# Altium PCB PCB2.PcbDoc
Units mm, origin at the board's own origin, x right, y up, seen from the top; angles counter-clockwise.
Board outline 152.4 x 101.6 mm, 4 copper layers (Top Layer, Mid-Layer 1, Mid-Layer 2, Bottom Layer); 6 components, 0 nets, 959 pads, 0 vias.
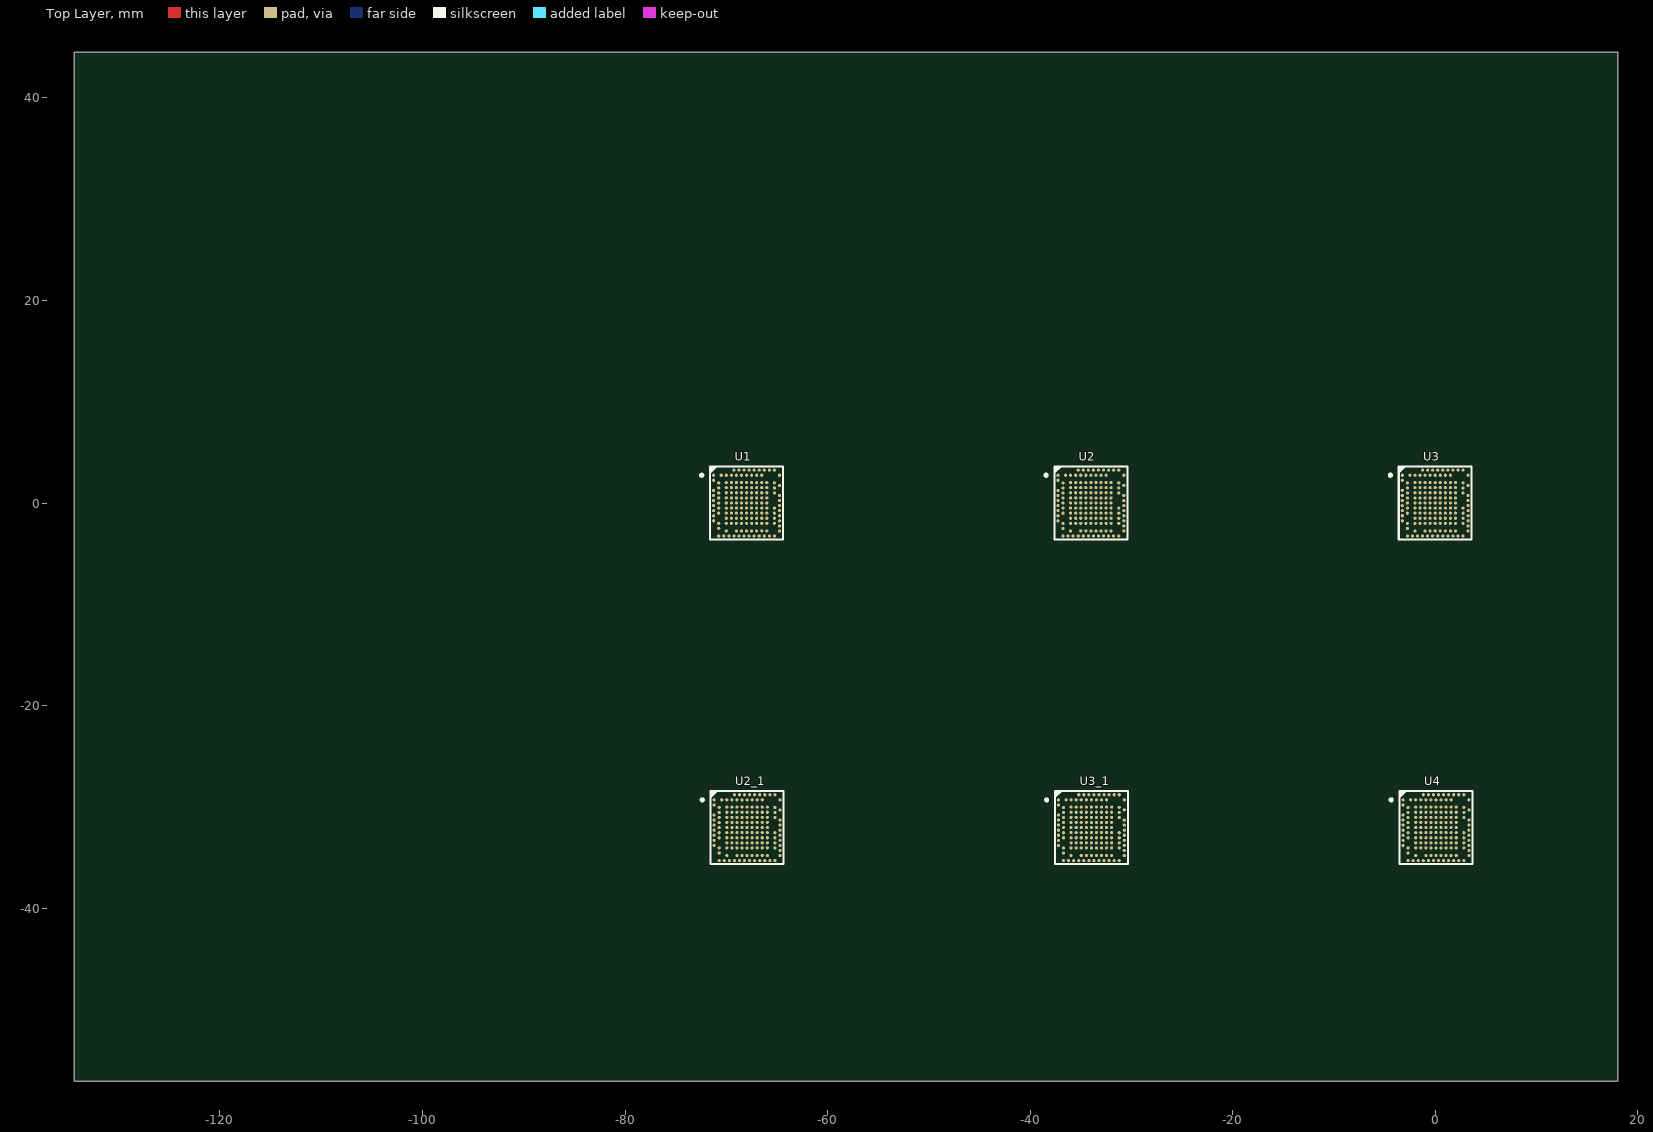
[diagram p0: Top Layer view]
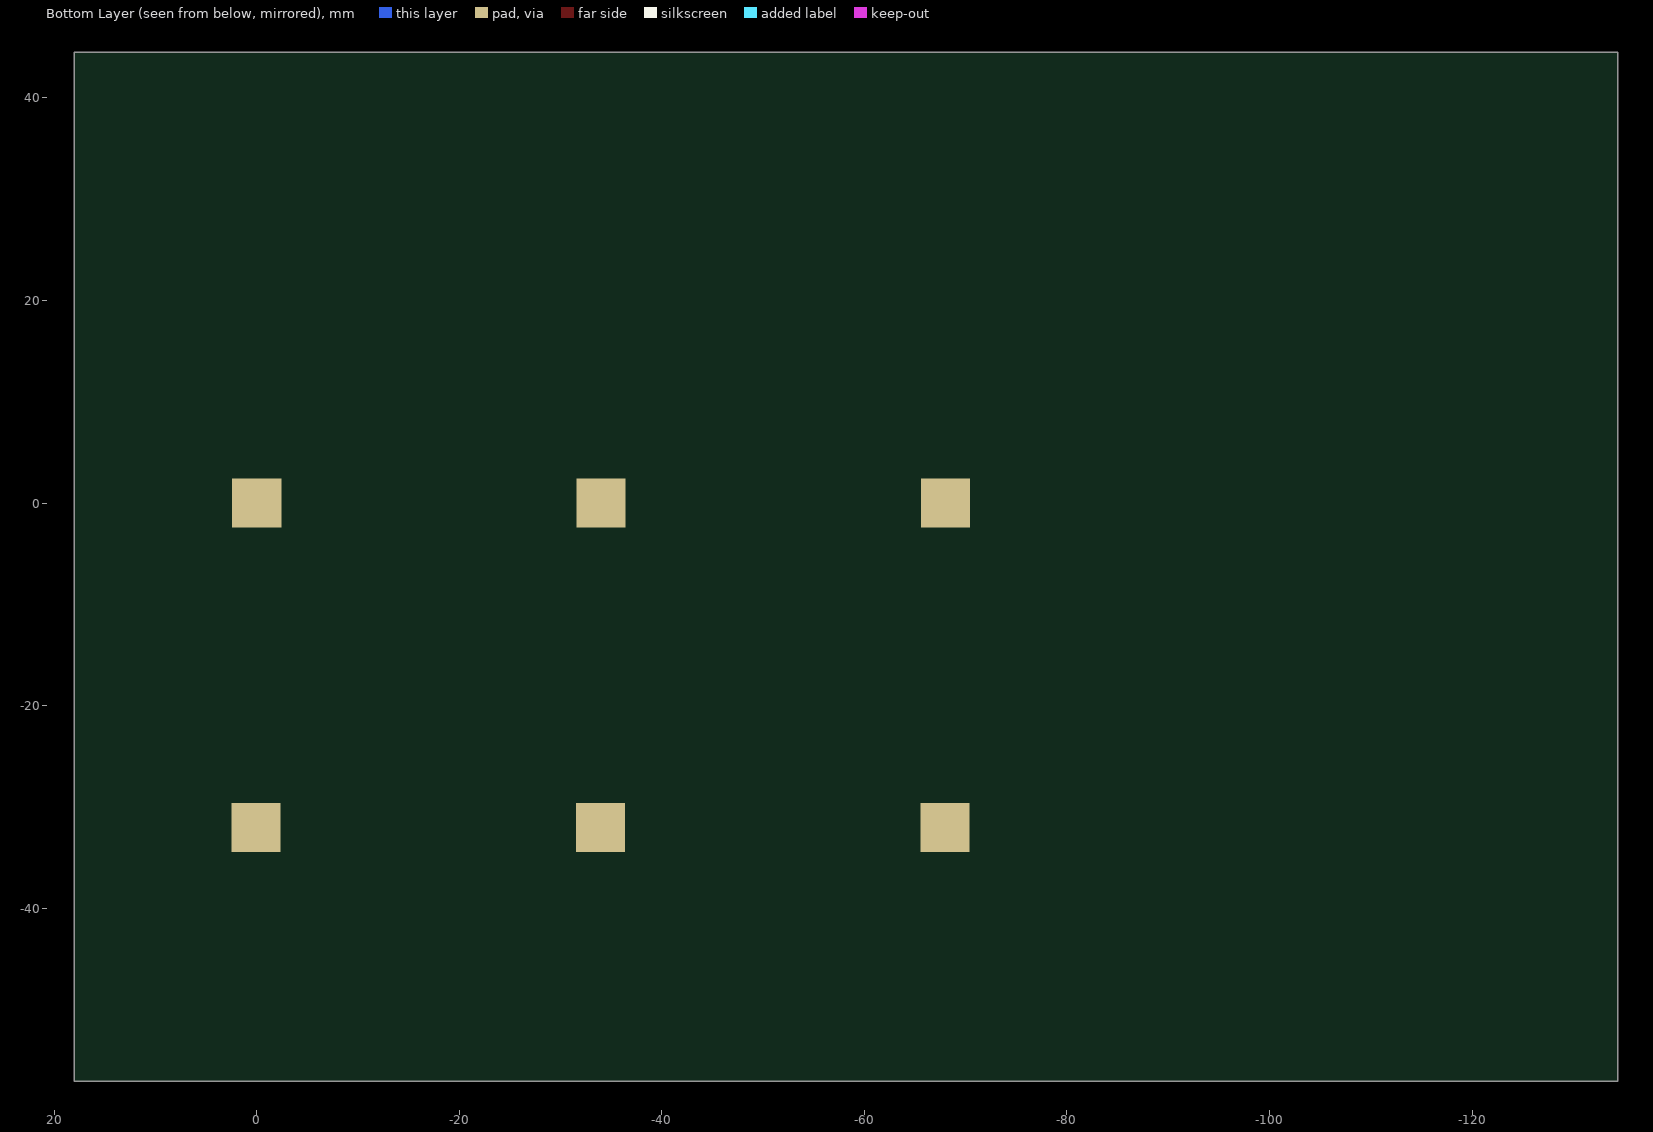
[diagram p1: Bottom Layer view, seen from below]

## Layer stack, top to bottom
Top Solder: solder mask 0.0102, Solder Resist, Dk 3.5
Top Layer: signal copper 0.0356
Dielectric 1: dielectric 0.32, FR-4, Dk 4.8
Mid-Layer 1: signal copper 0.0356
Dielectric3: dielectric 0.32, FR-4, Dk 4.8
Mid-Layer 2: signal copper 0.0356
Dielectric2: dielectric 0.32, FR-4, Dk 4.8
Bottom Layer: signal copper 0.0356
Bottom Solder: solder mask 0.0102, Solder Resist, Dk 3.5

## Board outline
-134.38,-57.088 18.02,-57.088 18.02,44.512 -134.38,44.512

## Design rules (kind name [scope] priority, off if disabled: settings)
Clearance [All] p1: gap=0.254 ignorepadtopadclearanceinfootprint=FALSE except(0: Arc-Hole Track-Hole SMDPad-Hole THPad-Hole Via-Hole Fill-Hole Poly-Hole Region-Hole Text-Hole)
PolygonConnect [All] p1: connectstyle=Relief reliefconductorwidth=0.254 reliefentries=4 polygonreliefangle="90 Angle" airgapwidth=0.254
RoutingVias [All] p1: holewidth=0.711 width=1.27 viastyle="Through Hole" minholewidth=0.711 minwidth=1.27 maxholewidth=0.711 maxwidth=1.27
SolderMaskExpansion [All] p1: expansion=0.102
Width [All] p1: maxlimit=0.254 minlimit=0.254 preferedwidth=0.254
30 further rules are at their usual default settings.

## Components (designator, comment, footprint, x,y, rotation, side; value= is the part's Value field where it differs from the comment)
U1 "nRF52840-QIAA" AQFN50P700X700X85_HS-74N -68,0 r0 top
U2 "nRF52840-QIAA" AQFN50P700X700X85_HS-74N -34,0 r0 top (schematic designator U1)
U2_1 "nRF52840-QIAA" AQFN50P700X700X85_HS-74N -67.95,-32.05 r0 top (schematic designator U1)
U3 "nRF52840-QIAA" AQFN50P700X700X85_HS-74N 0,0 r0 top (schematic designator U1)
U3_1 "nRF52840-QIAA" AQFN50P700X700X85_HS-74N -33.95,-32.05 r0 top (schematic designator U1)
U4 "nRF52840-QIAA" AQFN50P700X700X85_HS-74N 0.075,-32.05 r0 top (schematic designator U1)

## Footprints (in the part's own frame and the unit in brackets; to place one, negate y for a bottom-side part, rotate by r counter-clockwise, add the part's x,y. Pads: shape width x height; smd on the part's side, far side on the other; paste and mask are expansions set on the pad)
AQFN50P700X700X85_HS-74N [mm]
  rect 4.85x4.85 smd far side mask+0.03: 74(0,0)
  round 0.31 smd paste+0.012 mask+0.05: A8(-1.25,3.25) A10(-0.75,3.25) A12(-0.25,3.25) A14(0.25,3.25) A16(0.75,3.25) A18(1.25,3.25) A20(1.75,3.25) A22(2.25,3.25) A23(2.75,3.25) AA24(3.25,-2.25) AB2(-2.75,-2.5) AC5(-2,-2.75) AC9(-1,-2.75) AC11(-0.5,-2.75) AC13(0,-2.75) AC15(0.5,-2.75) AC17(1,-2.75) AC19(1.5,-2.75) AC21(2,-2.75) AC24(3.25,-2.75) AD2(-2.75,-3.25) AD4(-2.25,-3.25) AD6(-1.75,-3.25) AD8(-1.25,-3.25) AD10(-0.75,-3.25) AD12(-0.25,-3.25) AD14(0.25,-3.25) AD16(0.75,-3.25) AD18(1.25,-3.25) AD20(1.75,-3.25) AD22(2.25,-3.25) AD23(2.75,-3.25) B1(-3.25,2.75) B3(-2.5,2.75) B5(-2,2.75) B7(-1.5,2.75) B9(-1,2.75) B11(-0.5,2.75) B13(0,2.75) B15(0.5,2.75) B17(1,2.75) B19(1.5,2.75) B24(3.25,2.75) C1(-3.25,2.25) D2(-2.75,2) D23(2.75,2) E24(3.25,1.75) F2(-2.75,1.5) F23(2.75,1.5) G1(-3.25,1.25) H2(-2.75,1) H23(2.75,1) J1(-3.25,0.75) J24(3.25,0.75) K2(-2.75,0.5) L1(-3.25,0.25) L24(3.25,0.25) M2(-2.75,0) N1(-3.25,-0.25) N24(3.25,-0.25) P2(-2.75,-0.5) P23(2.75,-0.5) R1(-3.25,-0.75) R24(3.25,-0.75) T2(-2.75,-1) T23(2.75,-1) U1(-3.25,-1.25) U24(3.25,-1.25) V23(2.75,-1.5) W1(-3.25,-1.75) W24(3.25,-1.75) Y2(-2.75,-2) Y23(2.75,-2)
  silkscreen extent -4.55,-3.6 3.6,3.6, body extent -3.55,-3.55 3.55,3.55, height 0.85

## Part data
U1 U2 U2_1 U3 U3_1 U4: "Multi-protocol Bluetooth Low Energy, IEEE 802.15.4, ANT and 2.4GHz proprietary system-on-chip", Manufacturer="Nordic Semiconductor", Manufacturer Part Number=nRF52840-QIAAC0, Part number IPS=N.A., Artikkelnr Noca=N.A., Artikkelnr Simpro=N.A., ComponentLink1Description=Datasheet, ComponentLink2Description="Supplier link", Footprint Doc=AQFN-73, LatestRevisionDate=2017-12-06, Part Number=nRF52840-QIAAC0, Pin Count=73, Published=2017-08-21, Publisher="Nordic Semiconductor", Supplier="Nordic Semiconductor", Supplier part number=nRF52840-QIAAC0

## Free pads (board coordinates)
  round 0.31 smd paste+0.012 mask+0.05: 0(-70,-2) 0(-70,-1.497) 0(-70,-0.994) 0(-70,-0.491) 0(-70,0.012) 0(-70,0.516) 0(-70,1.019) 0(-70,1.522) 0(-70,2.025) 0(-69.95,-34.05) 0(-69.95,-33.547) 0(-69.95,-33.044) 0(-69.95,-32.541) 0(-69.95,-32.038) 0(-69.95,-31.534) 0(-69.95,-31.031) 0(-69.95,-30.528) 0(-69.95,-30.025) 0(-69.5,-2) 0(-69.5,-1.497) 0(-69.5,-0.994) 0(-69.5,-0.491) 0(-69.5,0.012) 0(-69.5,0.516) 0(-69.5,1.019) 0(-69.5,1.522) 0(-69.5,2.025) 0(-69.45,-34.05) 0(-69.45,-33.547) 0(-69.45,-33.044) 0(-69.45,-32.541) 0(-69.45,-32.038) 0(-69.45,-31.534) 0(-69.45,-31.031) 0(-69.45,-30.528) 0(-69.45,-30.025) 0(-69,-2) 0(-69,-1.497) 0(-69,-0.994) 0(-69,-0.491) 0(-69,0.012) 0(-69,0.516) 0(-69,1.019) 0(-69,1.522) 0(-69,2.025) 0(-68.95,-34.05) 0(-68.95,-33.547) 0(-68.95,-33.044) 0(-68.95,-32.541) 0(-68.95,-32.038) 0(-68.95,-31.534) 0(-68.95,-31.031) 0(-68.95,-30.528) 0(-68.95,-30.025) 0(-68.5,-2) 0(-68.5,-1.497) 0(-68.5,-0.994) 0(-68.5,-0.491) 0(-68.5,0.012) 0(-68.5,0.516) 0(-68.5,1.019) 0(-68.5,1.522) 0(-68.5,2.025) 0(-68.45,-34.05) 0(-68.45,-33.547) 0(-68.45,-33.044) 0(-68.45,-32.541) 0(-68.45,-32.038) 0(-68.45,-31.534) 0(-68.45,-31.031) 0(-68.45,-30.528) 0(-68.45,-30.025) 0(-68,-2) 0(-68,-1.497) 0(-68,-0.994) 0(-68,-0.491) 0(-68,0.012) 0(-68,0.516) 0(-68,1.019) 0(-68,1.522) 0(-68,2.025) 0(-67.95,-34.05) 0(-67.95,-33.547) 0(-67.95,-33.044) 0(-67.95,-32.541) 0(-67.95,-32.038) 0(-67.95,-31.534) 0(-67.95,-31.031) 0(-67.95,-30.528) 0(-67.95,-30.025) 0(-67.5,-2) 0(-67.5,-1.497) 0(-67.5,-0.994) 0(-67.5,-0.491) 0(-67.5,0.012) 0(-67.5,0.516) 0(-67.5,1.019) 0(-67.5,1.522) 0(-67.5,2.025) 0(-67.45,-34.05) 0(-67.45,-33.547) 0(-67.45,-33.044) 0(-67.45,-32.541) 0(-67.45,-32.038) 0(-67.45,-31.534) 0(-67.45,-31.031) 0(-67.45,-30.528) 0(-67.45,-30.025) 0(-67,-2) 0(-67,-1.497) 0(-67,-0.994) 0(-67,-0.491) 0(-67,0.012) 0(-67,0.516) 0(-67,1.019) 0(-67,1.522) 0(-67,2.025) 0(-66.95,-34.05) 0(-66.95,-33.547) 0(-66.95,-33.044) 0(-66.95,-32.541) 0(-66.95,-32.038) 0(-66.95,-31.534) 0(-66.95,-31.031) 0(-66.95,-30.528) 0(-66.95,-30.025) 0(-66.5,-2) 0(-66.5,-1.497) 0(-66.5,-0.994) 0(-66.5,-0.491) 0(-66.5,0.012) 0(-66.5,0.516) 0(-66.5,1.019) 0(-66.5,1.522) 0(-66.5,2.025) 0(-66.45,-34.05) 0(-66.45,-33.547) 0(-66.45,-33.044) 0(-66.45,-32.541) 0(-66.45,-32.038) 0(-66.45,-31.534) 0(-66.45,-31.031) 0(-66.45,-30.528) 0(-66.45,-30.025) 0(-66,-2) 0(-66,-1.497) 0(-66,-0.994) 0(-66,-0.491) 0(-66,0.012) 0(-66,0.516) 0(-66,1.019) 0(-66,1.522) 0(-66,2.025) 0(-65.95,-34.05) 0(-65.95,-33.547) 0(-65.95,-33.044) 0(-65.95,-32.541) 0(-65.95,-32.038) 0(-65.95,-31.534) 0(-65.95,-31.031) 0(-65.95,-30.528) 0(-65.95,-30.025) 0(-36,-2) 0(-36,-1.497) 0(-36,-0.994) 0(-36,-0.491) 0(-36,0.012) 0(-36,0.516) 0(-36,1.019) 0(-36,1.522) 0(-36,2.025) 0(-35.95,-34.05) 0(-35.95,-33.547) 0(-35.95,-33.044) 0(-35.95,-32.541) 0(-35.95,-32.038) 0(-35.95,-31.534) 0(-35.95,-31.031) 0(-35.95,-30.528) 0(-35.95,-30.025) 0(-35.5,-2) 0(-35.5,-1.497) 0(-35.5,-0.994) 0(-35.5,-0.491) 0(-35.5,0.012) 0(-35.5,0.516) 0(-35.5,1.019) 0(-35.5,1.522) 0(-35.5,2.025) 0(-35.45,-34.05) 0(-35.45,-33.547) 0(-35.45,-33.044) 0(-35.45,-32.541) 0(-35.45,-32.038) 0(-35.45,-31.534) 0(-35.45,-31.031) 0(-35.45,-30.528) 0(-35.45,-30.025) 0(-35,-2) 0(-35,-1.497) 0(-35,-0.994) 0(-35,-0.491) 0(-35,0.012) 0(-35,0.516) 0(-35,1.019) 0(-35,1.522) 0(-35,2.025) 0(-34.95,-34.05) 0(-34.95,-33.547) 0(-34.95,-33.044) 0(-34.95,-32.541) 0(-34.95,-32.038) 0(-34.95,-31.534) 0(-34.95,-31.031) 0(-34.95,-30.528) 0(-34.95,-30.025) 0(-34.5,-2) 0(-34.5,-1.497) 0(-34.5,-0.994) 0(-34.5,-0.491) 0(-34.5,0.012) 0(-34.5,0.516) 0(-34.5,1.019) 0(-34.5,1.522) 0(-34.5,2.025) 0(-34.45,-34.05) 0(-34.45,-33.547) 0(-34.45,-33.044) 0(-34.45,-32.541) 0(-34.45,-32.038) 0(-34.45,-31.534) 0(-34.45,-31.031) 0(-34.45,-30.528) 0(-34.45,-30.025) 0(-34,-2) 0(-34,-1.497) 0(-34,-0.994) 0(-34,-0.491) 0(-34,0.012) 0(-34,0.516) 0(-34,1.019) 0(-34,1.522) 0(-34,2.025) 0(-33.95,-34.05) 0(-33.95,-33.547) 0(-33.95,-33.044) 0(-33.95,-32.541) 0(-33.95,-32.038) 0(-33.95,-31.534) 0(-33.95,-31.031) 0(-33.95,-30.528) 0(-33.95,-30.025) 0(-33.5,-2) 0(-33.5,-1.497) 0(-33.5,-0.994) 0(-33.5,-0.491) 0(-33.5,0.012) 0(-33.5,0.516) 0(-33.5,1.019) 0(-33.5,1.522) 0(-33.5,2.025) 0(-33.45,-34.05) 0(-33.45,-33.547) 0(-33.45,-33.044) 0(-33.45,-32.541) 0(-33.45,-32.038) 0(-33.45,-31.534) 0(-33.45,-31.031) 0(-33.45,-30.528) 0(-33.45,-30.025) 0(-33,-2) 0(-33,-1.497) 0(-33,-0.994) 0(-33,-0.491) 0(-33,0.012) 0(-33,0.516) 0(-33,1.019) 0(-33,1.522) 0(-33,2.025) 0(-32.95,-34.05) 0(-32.95,-33.547) 0(-32.95,-33.044) 0(-32.95,-32.541) 0(-32.95,-32.038) 0(-32.95,-31.534) 0(-32.95,-31.031) 0(-32.95,-30.528) 0(-32.95,-30.025) 0(-32.5,-2) 0(-32.5,-1.497) 0(-32.5,-0.994) 0(-32.5,-0.491) 0(-32.5,0.012) 0(-32.5,0.516) 0(-32.5,1.019) 0(-32.5,1.522) 0(-32.5,2.025) 0(-32.45,-34.05) 0(-32.45,-33.547) 0(-32.45,-33.044) 0(-32.45,-32.541) 0(-32.45,-32.038) 0(-32.45,-31.534) 0(-32.45,-31.031) 0(-32.45,-30.528) 0(-32.45,-30.025) 0(-32,-2) 0(-32,-1.497) 0(-32,-0.994) 0(-32,-0.491) 0(-32,0.012) 0(-32,0.516) 0(-32,1.019) 0(-32,1.522) 0(-32,2.025) 0(-31.95,-34.05) 0(-31.95,-33.547) 0(-31.95,-33.044) 0(-31.95,-32.541) 0(-31.95,-32.038) 0(-31.95,-31.534) 0(-31.95,-31.031) 0(-31.95,-30.528) 0(-31.95,-30.025) 0(-2,-2) 0(-2,-1.497) 0(-2,-0.994) 0(-2,-0.491) 0(-2,0.012) 0(-2,0.516) 0(-2,1.019) 0(-2,1.522) 0(-2,2.025) 0(-1.925,-34.05) 0(-1.925,-33.547) 0(-1.925,-33.044) 0(-1.925,-32.541) 0(-1.925,-32.038) 0(-1.925,-31.534) 0(-1.925,-31.031) 0(-1.925,-30.528) 0(-1.925,-30.025) 0(-1.5,-2) 0(-1.5,-1.497) 0(-1.5,-0.994) 0(-1.5,-0.491) 0(-1.5,0.012) 0(-1.5,0.516) 0(-1.5,1.019) 0(-1.5,1.522) 0(-1.5,2.025) 0(-1.425,-34.05) 0(-1.425,-33.547) 0(-1.425,-33.044) 0(-1.425,-32.541) 0(-1.425,-32.038) 0(-1.425,-31.534) 0(-1.425,-31.031) 0(-1.425,-30.528) 0(-1.425,-30.025) 0(-1,-2) 0(-1,-1.497) 0(-1,-0.994) 0(-1,-0.491) 0(-1,0.012) 0(-1,0.516) 0(-1,1.019) 0(-1,1.522) 0(-1,2.025) 0(-0.925,-34.05) 0(-0.925,-33.547) 0(-0.925,-33.044) 0(-0.925,-32.541) 0(-0.925,-32.038) 0(-0.925,-31.534) 0(-0.925,-31.031) 0(-0.925,-30.528) 0(-0.925,-30.025) 0(-0.5,-2) 0(-0.5,-1.497) 0(-0.5,-0.994) 0(-0.5,-0.491) 0(-0.5,0.012) 0(-0.5,0.516) 0(-0.5,1.019) 0(-0.5,1.522) 0(-0.5,2.025) 0(-0.425,-34.05) 0(-0.425,-33.547) 0(-0.425,-33.044) 0(-0.425,-32.541) 0(-0.425,-32.038) 0(-0.425,-31.534) 0(-0.425,-31.031) 0(-0.425,-30.528) 0(-0.425,-30.025) 0(0,-2) 0(0,-1.497) 0(0,-0.994) 0(0,-0.491) 0(0,0.012) 0(0,0.516) 0(0,1.019) 0(0,1.522) 0(0,2.025) 0(0.075,-34.05) 0(0.075,-33.547) 0(0.075,-33.044) 0(0.075,-32.541) 0(0.075,-32.038) 0(0.075,-31.534) 0(0.075,-31.031) 0(0.075,-30.528) 0(0.075,-30.025) 0(0.5,-2) 0(0.5,-1.497) 0(0.5,-0.994) 0(0.5,-0.491) 0(0.5,0.012) 0(0.5,0.516) 0(0.5,1.019) 0(0.5,1.522) 0(0.5,2.025) 0(0.575,-34.05) 0(0.575,-33.547) 0(0.575,-33.044) 0(0.575,-32.541) 0(0.575,-32.038) 0(0.575,-31.534) 0(0.575,-31.031) 0(0.575,-30.528) 0(0.575,-30.025) 0(1,-2) 0(1,-1.497) 0(1,-0.994) 0(1,-0.491) 0(1,0.012) 0(1,0.516) 0(1,1.019) 0(1,1.522) 0(1,2.025) 0(1.075,-34.05) 0(1.075,-33.547) 0(1.075,-33.044) 0(1.075,-32.541) 0(1.075,-32.038) 0(1.075,-31.534) 0(1.075,-31.031) 0(1.075,-30.528) 0(1.075,-30.025) 0(1.5,-2) 0(1.5,-1.497) 0(1.5,-0.994) 0(1.5,-0.491) 0(1.5,0.012) 0(1.5,0.516) 0(1.5,1.019) 0(1.5,1.522) 0(1.5,2.025) 0(1.575,-34.05) 0(1.575,-33.547) 0(1.575,-33.044) 0(1.575,-32.541) 0(1.575,-32.038) 0(1.575,-31.534) 0(1.575,-31.031) 0(1.575,-30.528) 0(1.575,-30.025) 0(2,-2) 0(2,-1.497) 0(2,-0.994) 0(2,-0.491) 0(2,0.012) 0(2,0.516) 0(2,1.019) 0(2,1.522) 0(2,2.025) 0(2.075,-34.05) 0(2.075,-33.547) 0(2.075,-33.044) 0(2.075,-32.541) 0(2.075,-32.038) 0(2.075,-31.534) 0(2.075,-31.031) 0(2.075,-30.528) 0(2.075,-30.025)
  round 3 on Top Paste paste+0.012 mask+0.05: 3(-80.25,11.75) 3(-80.2,-20.3) 3(-46.25,11.75) 3(-46.2,-20.3) 3(-12.25,11.75) 3(-12.175,-20.3) 4(-56.25,11.75) 4(-56.2,-20.3) 4(-22.25,11.75) 4(-22.2,-20.3) 4(11.75,11.75) 4(11.825,-20.3) 5(-80.25,-10.25) 5(-80.2,-42.3) 5(-46.25,-10.25) 5(-46.2,-42.3) 5(-12.25,-10.25) 5(-12.175,-42.3) 6(-56.25,-10.25) 6(-56.2,-42.3) 6(-22.25,-10.25) 6(-22.2,-42.3) 6(11.75,-10.25) 6(11.825,-42.3)
  rect 7.1x7.1 on Top Paste paste+0.012 mask+0.05: 7(-67.95,-32) 7(-34,0.05) 8(-33.95,-32.05) 8(0,0) 8(0.075,-32.05)

## Nets (pads, with @x,y where several pads share a name; then routed paths per layer and width w, separated by ;. In a path a pad name is that pad's centre, name@x,y a point inside that pad or via, vN(x,y) a via of type N, cw(c..) or ccw(c..) an arc to the next point about the centre after c; other vN are vias at no path point)
pads on no net: U1.74 U1.A8 U1.A10 U1.A12 U1.A14 U1.A16 U1.A18 U1.A20 U1.A22 U1.A23 U1.AA24 U1.AB2 U1.AC5 U1.AC9 U1.AC11 U1.AC13 U1.AC15 U1.AC17 U1.AC19 U1.AC21 U1.AC24 U1.AD2 U1.AD4 U1.AD6 U1.AD8 U1.AD10 U1.AD12 U1.AD14 U1.AD16 U1.AD18 U1.AD20 U1.AD22 U1.AD23 U1.B1 U1.B3 U1.B5 U1.B7 U1.B9 U1.B11 U1.B13 U1.B15 U1.B17 U1.B19 U1.B24 U1.C1 U1.D2 U1.D23 U1.E24 U1.F2 U1.F23 U1.G1 U1.H2 U1.H23 U1.J1 U1.J24 U1.K2 U1.L1 U1.L24 U1.M2 U1.N1 U1.N24 U1.P2 U1.P23 U1.R1 U1.R24 U1.T2 U1.T23 U1.U1 U1.U24 U1.V23 U1.W1 U1.W24 U1.Y2 U1.Y23 U2.74 U2.A8 U2.A10 U2.A12 U2.A14 U2.A16 U2.A18 U2.A20 U2.A22 U2.A23 U2.AA24 U2.AB2 U2.AC5 U2.AC9 U2.AC11 U2.AC13 U2.AC15 U2.AC17 U2.AC19 U2.AC21 U2.AC24 U2.AD2 U2.AD4 U2.AD6 U2.AD8 U2.AD10 U2.AD12 U2.AD14 U2.AD16 U2.AD18 U2.AD20 U2.AD22 U2.AD23 U2.B1 U2.B3 U2.B5 U2.B7 U2.B9 U2.B11 U2.B13 U2.B15 U2.B17 U2.B19 U2.B24 U2.C1 U2.D2 U2.D23 U2.E24 U2.F2 U2.F23 U2.G1 U2.H2 U2.H23 U2.J1 U2.J24 U2.K2 U2.L1 U2.L24 U2.M2 U2.N1 U2.N24 U2.P2 U2.P23 U2.R1 U2.R24 U2.T2 U2.T23 U2.U1 U2.U24 U2.V23 U2.W1 U2.W24 U2.Y2 U2.Y23 U2_1.74 U2_1.A8 U2_1.A10 U2_1.A12 U2_1.A14 U2_1.A16 U2_1.A18 U2_1.A20 U2_1.A22 U2_1.A23 U2_1.AA24 U2_1.AB2 U2_1.AC5 U2_1.AC9 U2_1.AC11 U2_1.AC13 U2_1.AC15 U2_1.AC17 U2_1.AC19 U2_1.AC21 U2_1.AC24 U2_1.AD2 U2_1.AD4 U2_1.AD6 U2_1.AD8 U2_1.AD10 U2_1.AD12 U2_1.AD14 U2_1.AD16 U2_1.AD18 U2_1.AD20 U2_1.AD22 U2_1.AD23 U2_1.B1 U2_1.B3 U2_1.B5 U2_1.B7 U2_1.B9 U2_1.B11 U2_1.B13 U2_1.B15 U2_1.B17 U2_1.B19 U2_1.B24 U2_1.C1 U2_1.D2 U2_1.D23 U2_1.E24 U2_1.F2 U2_1.F23 U2_1.G1 U2_1.H2 U2_1.H23 U2_1.J1 U2_1.J24 U2_1.K2 U2_1.L1 U2_1.L24 U2_1.M2 U2_1.N1 U2_1.N24 U2_1.P2 U2_1.P23 U2_1.R1 U2_1.R24 U2_1.T2 U2_1.T23 U2_1.U1 U2_1.U24 U2_1.V23 U2_1.W1 U2_1.W24 U2_1.Y2 U2_1.Y23 U3.74 U3.A8 U3.A10 U3.A12 U3.A14 U3.A16 U3.A18 U3.A20 U3.A22 U3.A23 U3.AA24 U3.AB2 U3.AC5 U3.AC9 U3.AC11 U3.AC13 U3.AC15 U3.AC17 U3.AC19 U3.AC21 U3.AC24 U3.AD2 U3.AD4 U3.AD6 U3.AD8 U3.AD10 U3.AD12 U3.AD14 U3.AD16 U3.AD18 U3.AD20 U3.AD22 U3.AD23 U3.B1 U3.B3 U3.B5 U3.B7 U3.B9 U3.B11 U3.B13 U3.B15 U3.B17 U3.B19 U3.B24 U3.C1 U3.D2 U3.D23 U3.E24 U3.F2 U3.F23 U3.G1 U3.H2 U3.H23 U3.J1 U3.J24 U3.K2 U3.L1 U3.L24 U3.M2 U3.N1 U3.N24 U3.P2 U3.P23 U3.R1 U3.R24 U3.T2 U3.T23 U3.U1 U3.U24 U3.V23 U3.W1 U3.W24 U3.Y2 U3.Y23 U3_1.74 U3_1.A8 U3_1.A10 U3_1.A12 U3_1.A14 U3_1.A16 U3_1.A18 U3_1.A20 U3_1.A22 U3_1.A23 U3_1.AA24 U3_1.AB2 U3_1.AC5 U3_1.AC9 U3_1.AC11 U3_1.AC13 U3_1.AC15 U3_1.AC17 U3_1.AC19 U3_1.AC21 U3_1.AC24 U3_1.AD2 U3_1.AD4 U3_1.AD6 U3_1.AD8 U3_1.AD10 U3_1.AD12 U3_1.AD14 U3_1.AD16 U3_1.AD18 U3_1.AD20 U3_1.AD22 U3_1.AD23 U3_1.B1 U3_1.B3 U3_1.B5 U3_1.B7 U3_1.B9 U3_1.B11 U3_1.B13 U3_1.B15 U3_1.B17 U3_1.B19 U3_1.B24 U3_1.C1 U3_1.D2 U3_1.D23 U3_1.E24 U3_1.F2 U3_1.F23 U3_1.G1 U3_1.H2 U3_1.H23 U3_1.J1 U3_1.J24 U3_1.K2 U3_1.L1 U3_1.L24 U3_1.M2 U3_1.N1 U3_1.N24 U3_1.P2 U3_1.P23 U3_1.R1 U3_1.R24 U3_1.T2 U3_1.T23 U3_1.U1 U3_1.U24 U3_1.V23 U3_1.W1 U3_1.W24 U3_1.Y2 U3_1.Y23 U4.74 U4.A8 U4.A10 U4.A12 U4.A14 U4.A16 U4.A18 U4.A20 U4.A22 U4.A23 U4.AA24 U4.AB2 U4.AC5 U4.AC9 U4.AC11 U4.AC13 U4.AC15 U4.AC17 U4.AC19 U4.AC21 U4.AC24 U4.AD2 U4.AD4 U4.AD6 U4.AD8 U4.AD10 U4.AD12 U4.AD14 U4.AD16 U4.AD18 U4.AD20 U4.AD22 U4.AD23 U4.B1 U4.B3 U4.B5 U4.B7 U4.B9 U4.B11 U4.B13 U4.B15 U4.B17 U4.B19 U4.B24 U4.C1 U4.D2 U4.D23 U4.E24 U4.F2 U4.F23 U4.G1 U4.H2 U4.H23 U4.J1 U4.J24 U4.K2 U4.L1 U4.L24 U4.M2 U4.N1 U4.N24 U4.P2 U4.P23 U4.R1 U4.R24 U4.T2 U4.T23 U4.U1 U4.U24 U4.V23 U4.W1 U4.W24 U4.Y2 U4.Y23

## Silkscreen, mask and mechanical layers (free items; w line width, h text height)
Top Paste:
  lines w0.762: -85.25,-10.25 -85.25,-15.25 -80.25,-15.25 ; -85.25,-4.25 -85.25,5.75 ; -85.25,11.75 -85.25,16.75 -80.25,16.75 ; -80.2,-47.3 -85.2,-47.3 ; -80.2,-15.3 -85.2,-15.3 ; -73.25,-15.25 -62.25,-15.25 ; -73.25,16.75 -64.25,16.75 ; -73.2,-47.3 -62.2,-47.3 ; -73.2,-15.3 -64.2,-15.3 ; -56.25,-15.25 -51.25,-15.25 ; -56.25,16.75 -51.25,16.75 ; -56.2,-47.3 -51.2,-47.3 ; -56.2,-15.3 -51.2,-15.3 ; -46.25,-15.25 -51.25,-15.25 ; -46.25,16.75 -51.25,16.75 ; -46.2,-47.3 -51.2,-47.3 ; -46.2,-15.3 -51.2,-15.3 ; -39.25,-15.25 -28.25,-15.25 ; -39.25,16.75 -30.25,16.75 ; -39.2,-47.3 -28.2,-47.3 ; -39.2,-15.3 -30.2,-15.3 ; -22.25,-15.25 -17.25,-15.25 ; -22.25,16.75 -17.25,16.75 ; -22.2,-47.3 -17.2,-47.3 -17.2,-42.3 ; -22.2,-15.3 -17.2,-15.3 -17.2,-20.3 ; -17.2,-36.3 -17.2,-26.3 ; -12.25,-15.25 -17.25,-15.25 ; -12.25,16.75 -17.25,16.75 ; -12.175,-47.3 -17.175,-47.3 ; -12.175,-15.3 -17.175,-15.3 ; -5.25,-15.25 5.75,-15.25 ; -5.25,16.75 3.75,16.75 ; -5.175,-47.3 5.825,-47.3 ; -5.175,-15.3 3.825,-15.3 ; 11.75,-15.25 16.75,-15.25 16.75,-10.25 ; 11.75,16.75 16.75,16.75 16.75,11.75 ; 11.825,-47.3 16.825,-47.3 16.825,-42.3 ; 11.825,-15.3 16.825,-15.3 16.825,-20.3 ; 16.75,-4.25 16.75,5.75 ; 16.825,-36.3 16.825,-26.3 ; -85.2,-47.3 -85.2,-42.3 -85.2,-47.3 ; -85.2,-15.3 -85.2,-20.3 -85.2,-15.3 ; -51.25,-15.25 -51.25,-10.25 -51.25,-15.25 ; -51.25,16.75 -51.25,11.75 -51.25,16.75 ; -51.2,-47.3 -51.2,-42.3 -51.2,-47.3 ; -51.2,-15.3 -51.2,-20.3 -51.2,-15.3 ; -17.25,-15.25 -17.25,-10.25 -17.25,-15.25 ; -17.25,16.75 -17.25,11.75 -17.25,16.75 ; -17.175,-47.3 -17.175,-42.3 -17.175,-47.3 ; -17.175,-15.3 -17.175,-20.3 -17.175,-15.3 ; -85.2,-36.3 -85.2,-26.3 -85.2,-36.3 ; -51.25,-4.25 -51.25,5.75 -51.25,-4.25 ; -51.2,-36.3 -51.2,-26.3 -51.2,-36.3 ; -17.25,-4.25 -17.25,5.75 -17.25,-4.25 ; -17.175,-36.3 -17.175,-26.3 -17.175,-36.3